# Altium PCB PCB1.PcbDoc
Units mil, origin at the board's own origin, x right, y up, seen from the top; angles counter-clockwise.
Board outline 6000 x 4000 mil, 2 copper layers (Top Layer, Bottom Layer); 2 components, 0 nets, 34 pads, 0 vias.
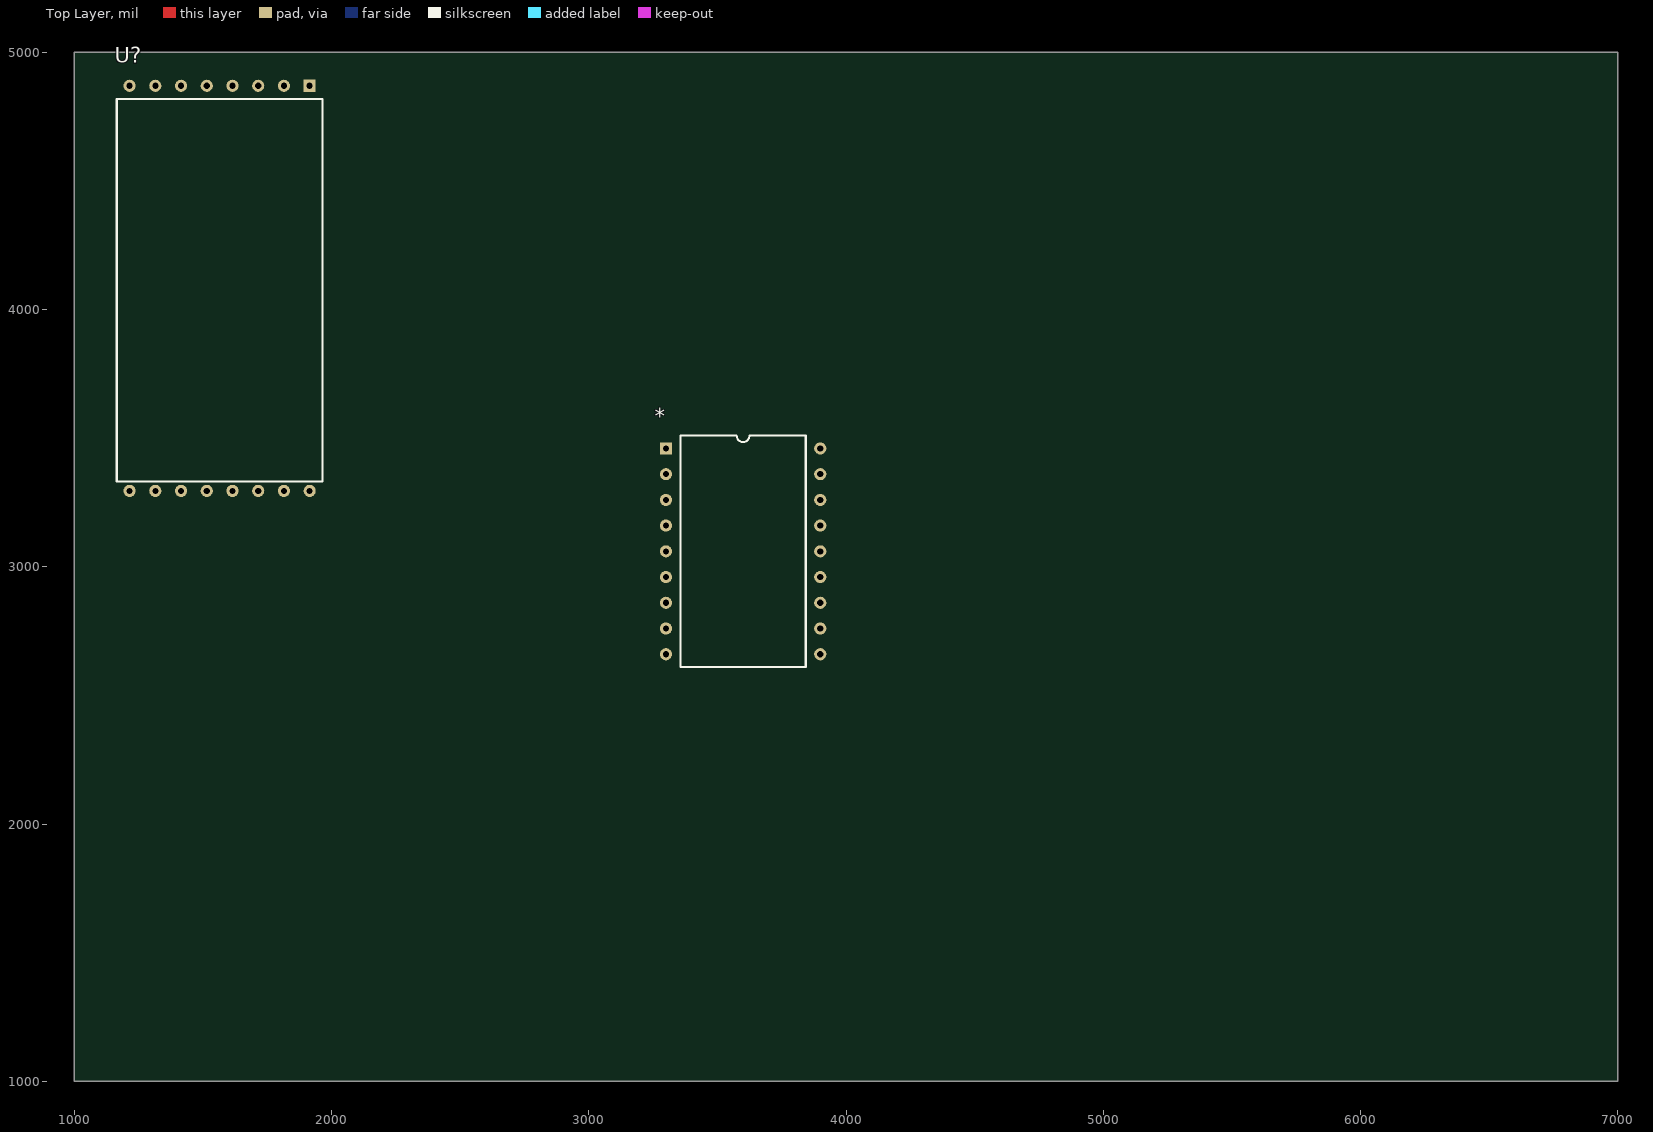
[diagram p0: Top Layer view]
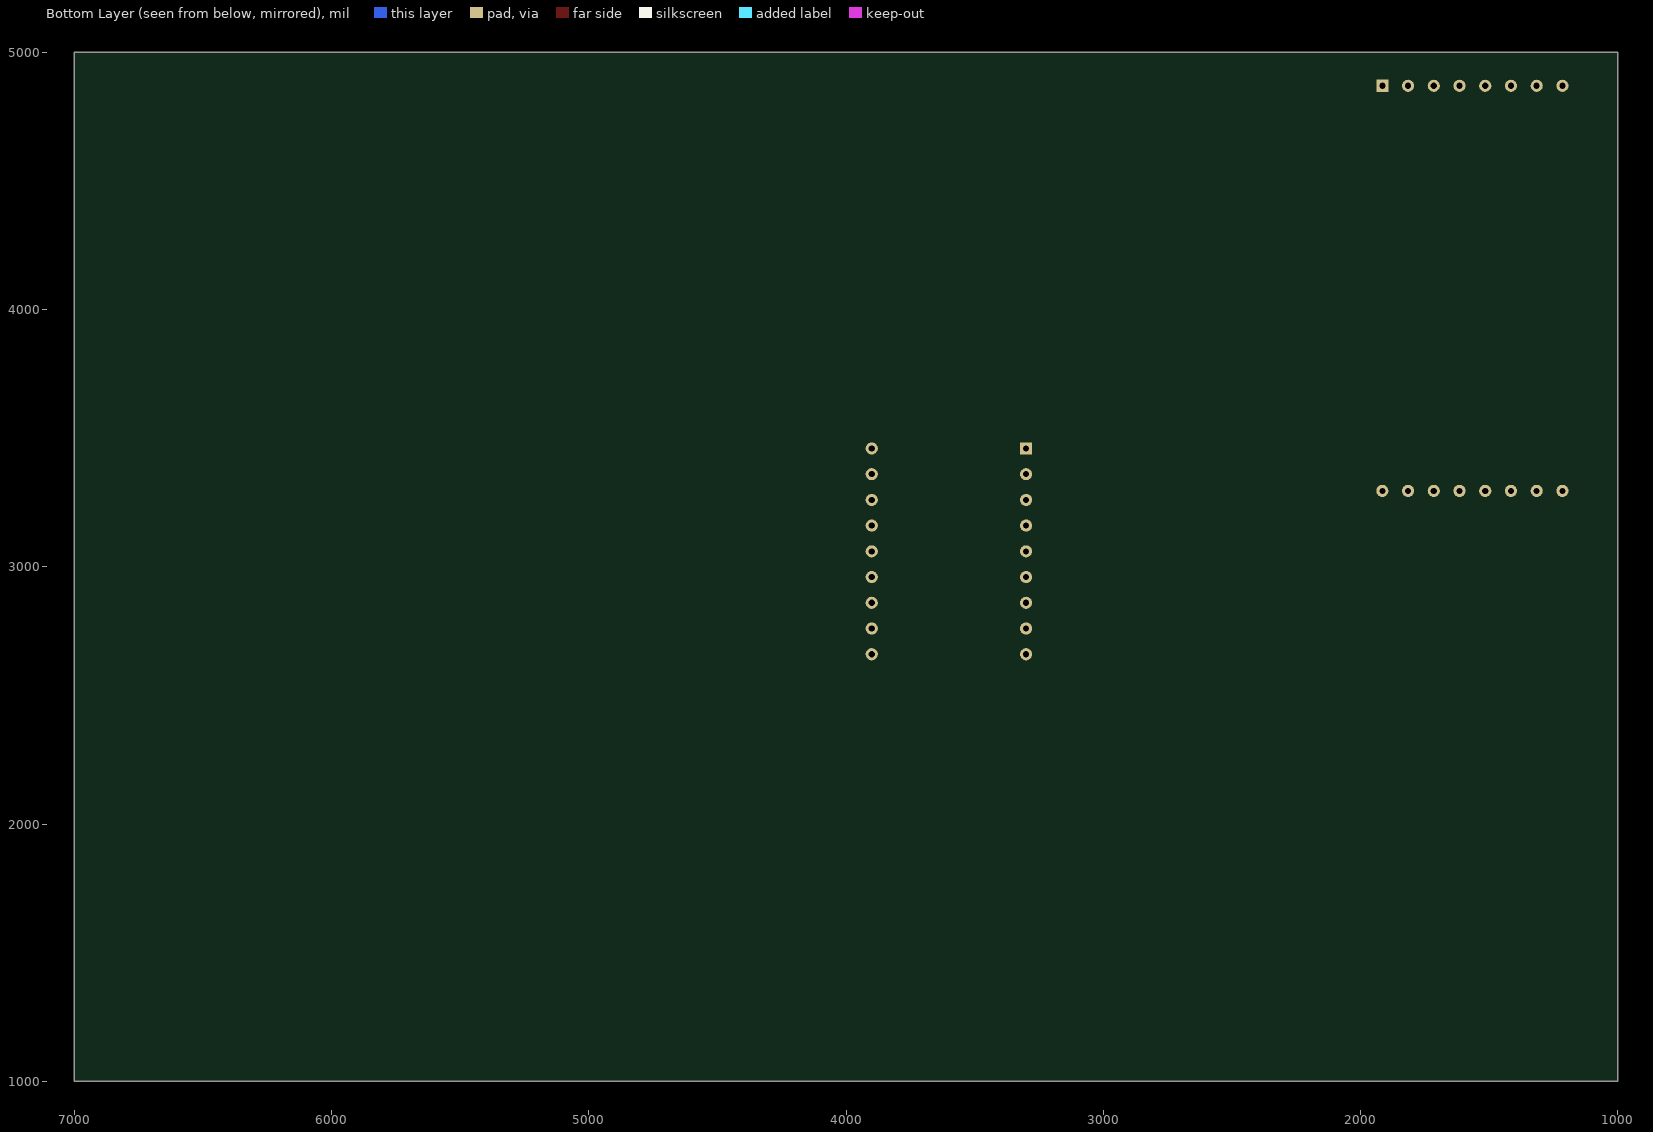
[diagram p1: Bottom Layer view, seen from below]

## Layer stack, top to bottom
Top Solder: solder mask 0.4, Solder Resist, Dk 3.5
Top Layer: signal copper 1.4
Dielectric 1: dielectric 12.6, FR-4, Dk 4.8
Bottom Layer: signal copper 1.4
Bottom Solder: solder mask 0.4, Solder Resist, Dk 3.5

## Board outline
1000,1000 7000,1000 7000,5000 1000,5000

## Design rules (kind name [scope] priority, off if disabled: settings)
Clearance [All] p1: gap=10 ignorepadtopadclearanceinfootprint=FALSE except(0: Arc-Hole Track-Hole SMDPad-Hole THPad-Hole Via-Hole Fill-Hole Poly-Hole Region-Hole Text-Hole)
PolygonConnect [All] p1: connectstyle=Relief reliefconductorwidth=10 reliefentries=4 polygonreliefangle="90 Angle" airgapwidth=10
RoutingVias [All] p1: holewidth=28 width=50 viastyle="Through Hole" minholewidth=28 minwidth=50 maxholewidth=28 maxwidth=50
SolderMaskExpansion [All] p1: expansion=4 istentingtop=FALSE
Width [All] p1: maxlimit=10 minlimit=10 preferedwidth=10
30 further rules are at their usual default settings.

## Classes and differential pairs
component class Sheet1: *

## Components (designator, comment, footprint, x,y, rotation, side; value= is the part's Value field where it differs from the comment)
* "FTDI module" "FTDI module" 3300,3460 r0 top
U? "LM2596 module" "LM2596 module" 1165,4869.8 r0 top

## Footprints (in the part's own frame and the unit in brackets; to place one, negate y for a bottom-side part, rotate by r counter-clockwise, add the part's x,y. Pads: shape width x height; smd on the part's side, far side on the other; paste and mask are expansions set on the pad)
"FTDI module" [mm]
  round 1.2 hole 0.6: 3.3V(0,-10.16) 5V(0,-12.7) CTS(0,-7.62) DCD(15.24,0) DTR(15.24,-17.78) ENTEN(0,-2.54) GND(0,-20.32) GND(15.24,-5.08) R1(15.24,-7.62) RSD(15.24,-2.54) RTS(15.24,-15.24) RXD(15.24,-10.16) RXL(0,-15.24) SLEEP(0,-5.08) TXD(15.24,-20.32) TXL(0,-17.78) VCC(15.24,-12.7)
  rect 1.2x1.2 hole 0.6: PWR(0,0)
  silkscreen extent 1.43,-21.59 13.81,1.27, body extent -1.36,-22.5 16.51,1.92, height 4.77
"LM2596 module" [mm]
  round 1.2 hole 0.6: 2(16.51,0) 3(13.97,0) 4(11.43,0) 5(8.89,0) 6(6.35,0) 7(3.81,0) 10(3.81,-40) 11(6.35,-40) 12(8.89,-40) 13(11.43,-40) 14(13.97,-40) 15(16.51,-40) IN+(1.27,-40) IN-(19.05,-40) OUT+(1.27,0)
  rect 1.2x1.2 hole 0.6: OUT-(19.05,0)
  silkscreen extent 0,-39.05 20.32,-1.28, body extent -0.47,-41.67 20.79,1.53, height 13.35

## Nets (pads, with @x,y where several pads share a name; then routed paths per layer and width w, separated by ;. In a path a pad name is that pad's centre, name@x,y a point inside that pad or via, vN(x,y) a via of type N, cw(c..) or ccw(c..) an arc to the next point about the centre after c; other vN are vias at no path point)
pads on no net: *.3.3V *.5V *.CTS *.DCD *.DTR *.ENTEN *.GND *.PWR *.R1 *.RSD *.RTS *.RXD *.RXL *.SLEEP *.TXD *.TXL *.VCC U?.2 U?.3 U?.4 U?.5 U?.6 U?.7 U?.10 U?.11 U?.12 U?.13 U?.14 U?.15 U?.IN+ U?.IN- U?.OUT+ U?.OUT-